# Altium PCB DTM17E0000_REV1.PcbDoc
Units mm, origin at the board's own origin, x right, y up, seen from the top; angles counter-clockwise.
Board outline 50.8 x 22.35 mm, 2 copper layers (Top Layer, Bottom Layer); 47 components, 29 nets, 165 pads, 94 vias.
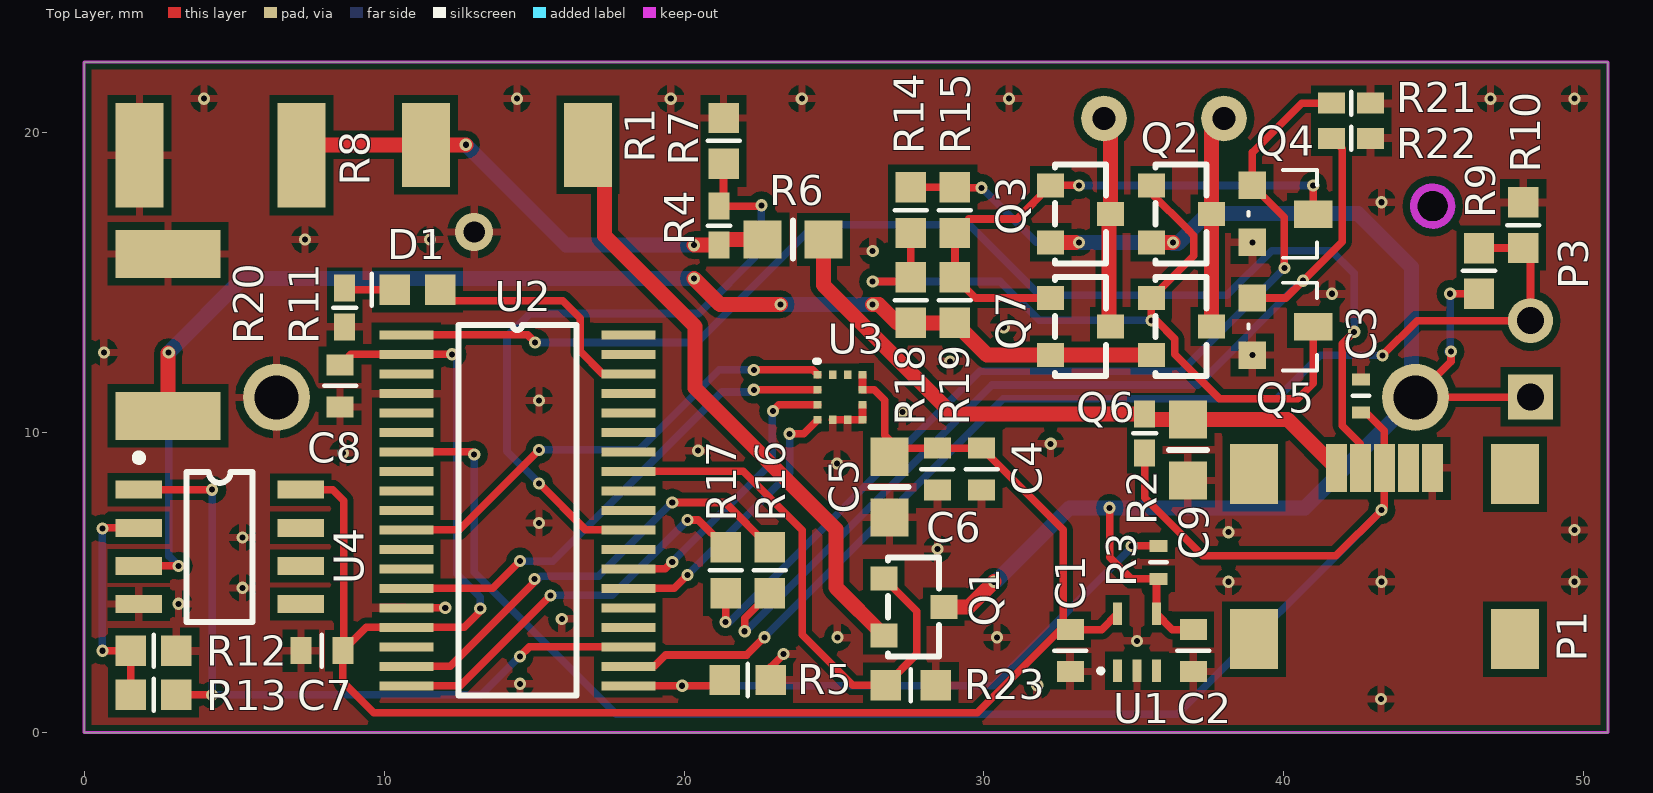
[diagram p0: Top Layer view]
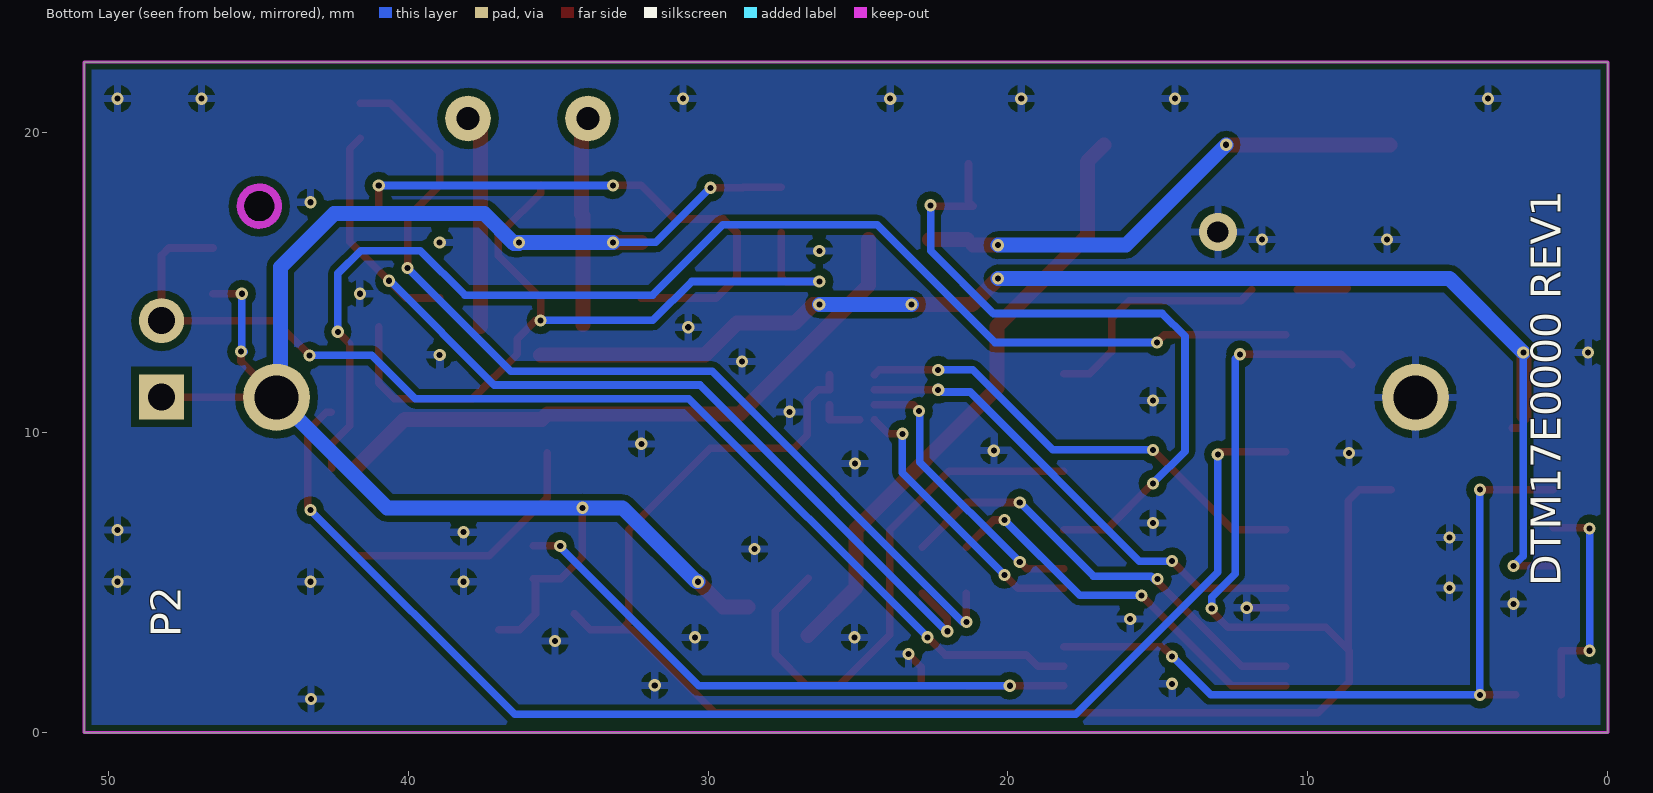
[diagram p1: Bottom Layer view, seen from below]

## Layer stack, top to bottom
Top Solder: solder mask 0.0102, Solder Resist, Dk 3.5
Top Layer: signal copper 0.0356
Dielectric 1: dielectric 0.32, FR-4, Dk 4.8
Bottom Layer: signal copper 0.0356
Bottom Solder: solder mask 0.0102, Solder Resist, Dk 3.5

## Board outline
0,0 50.8,0 50.8,22.352 0,22.352

## Design rules (kind name [scope] priority, off if disabled: settings)
Clearance 0. [All] p1: gap=0.254 except(0.1: SMDPad-SMDPad SMDPad-THPad THPad-THPad; 0.2: Track-Track Track-SMDPad Track-THPad Track-Poly Text-Text)
PolygonConnect [All] p1: connectstyle=Relief reliefconductorwidth=0.254 reliefentries=4 polygonreliefangle="90 Angle" airgapwidth=0.254
RoutingVias [All] p1: holewidth=0.203 width=0.406 viastyle="Through Hole" minholewidth=0.2 minwidth=0.4 maxholewidth=0.25 maxwidth=0.45
SolderMaskExpansion [All] p1: expansion=0.102
Width [All] p1: maxlimit=0.5 minlimit=0.254 preferedwidth=0.254 minimp=50.000000 maximp=50.000000 favimp=50.000000
30 further rules are at their usual default settings.

## Components (designator, comment, footprint, x,y, rotation, side; value= is the part's Value field where it differs from the comment)
C1 "0.1uF" "0603 Small" 32.876,2.732 r90 top
C2 "0.1uF" "0603 Small" 36.978,2.732 r270 top
C3 "1nF" "0402 Small" 42.57,11.227 r270 top
C4 "0.1uF" "0603 Small" 29.92,8.781 r90 top
C5 "10uF" "0805 Small" 26.846,8.18 r90 top
C6 "0.1uF" "0603 Small" 28.447,8.781 r270 top
C7 "0.1uF" "0603 Small" 7.925,2.728 r180 top
C8 "0.1uF" "0603 Small" 8.534,11.558 r270 top
C9 "10uF" "0805 Small" 36.805,9.423 r90 top
D1 "RED" "0603 LED" 11.114,14.757 r180 top
P1 "Mini USB" "Mini USB" 39,3.114 r90 top
P2 "BH123A" "BH123A - duplicate" 6.415,11.176 r0 bottom
P3 "Header 2H" "Header 2" 48.218,11.191 r180 top
Q1 "MOSFET-N" SOT23 27.661,4.191 r270 top
Q2 "MOSFET-P" SOT23 36.581,17.292 r270 top
Q3 "MOSFET-P" SOT23 33.223,17.292 r270 top
Q4 "MMST2222A" SOT-23N 39.961,17.292 r270 top
Q5 "MMST2222A" SOT-23N 39.961,13.536 r270 top
Q6 "MOSFET-N" SOT23 36.581,13.536 r270 top
Q7 "MOSFET-N" SOT23 33.223,13.536 r270 top
R1 "2.7Ω" "2010 resistor" 14.097,19.596 r180 top
R2 "47K" "0402 Resistor" 35.357,9.974 r270 top
R3 "2.7M" "0402 Small" 35.821,5.674 r90 top
R4 "330K" "0402 Resistor" 21.165,16.899 r90 top
R5 "1MΩ" "0603 Resistor" 22.123,1.753 r180 top
R6 "2.4" "0805 Small" 23.629,16.434 r0 top
R7 "1M" "0603 resistor"#1 21.318,19.726 r90 top
R8 "13Ω" "2512 RESISTOR" 4.546,19.246 r0 top
R9 "1MΩ" "0603 Resistor" 46.502,15.392 r270 top
R10 "1MΩ" "0603 Resistor" 47.976,16.916 r270 top (schematic designator R2)
R11 "1KΩ" "0402 Resistor" 8.687,14.165 r90 top
R12 "100KΩ" "0603 Resistor" 2.316,2.728 r180 top
R13 "1MΩ" "0603 Resistor" 2.316,1.255 r180 top
R14 "1M" "0603 resistor"#1 27.559,17.417 r270 top
R15 "1M" "0603 resistor"#1 29.032,17.417 r270 top
R16 "1K" "0603 resistor"#1 22.86,5.41 r90 top
R17 "1K" "0603 resistor"#1 21.387,5.41 r270 top
R18 "10M" "0603 resistor"#1 27.559,14.419 r90 top
R19 "10M" "0603 resistor"#1 29.032,14.419 r90 top
R20 "0.1" "2512 RESISTOR" 2.796,13.259 r270 top
R21 "10K" "0402 Resistor" 42.243,20.98 r0 top
R22 "10K" "0402 Resistor" 42.243,19.812 r0 top
R23 "1K" "0603 resistor"#2 27.558,1.576 r0 top
U1 "TPS71533DCKR" SC70_5 34.451,2.057 r90 top
U2 "MSP430F2272IDA" MSP430F2272IDA 10.744,13.259 r0 top
U3 "LIS2HH12" LIS2HH12 24.451,11.926 r0 top
U4 "TS27L2" SOIC-8 4.521,6.192 r0 top

## Footprints (in the part's own frame and the unit in brackets; to place one, negate y for a bottom-side part, rotate by r counter-clockwise, add the part's x,y. Pads: shape width x height; smd on the part's side, far side on the other; paste and mask are expansions set on the pad)
"0402 Resistor" [mm]
  rect 0.9x0.7 smd: 1(-0.65,0) 2(0.65,0)
  silkscreen extent 0,-0.38 0,0.38, body extent -0.52,-0.27 0.53,0.28, height 0.25
"0402 Small" [mm]
  rect 0.4x0.6 smd: 1(-0.55,0) 2(0.55,0)
  silkscreen extent 0,-0.27 0,0.28, body extent -0.52,-0.27 0.53,0.28, height 0.25
"0603 LED" [mil]
  rect 40x40 smd: 1(-30,0) 2(30,0)
  silkscreen extent 60,-21 60,21, body extent -31,-16 32,16, height 37
"0603 Resistor" [mil] "Axial Device, Thru-Hole; 2 Leads; 0.3 in Pin Spacing"
  rect 40x40 smd: 1(-30,0) 2(30,0)
  silkscreen extent 0,-21 0,21, body extent -30,-15 31,15, height 20
"0603 resistor"#1 [mil]
  rect 40x40 smd: 1(-30,0) 2(30,0)
  silkscreen extent 0,-21 0,21, body extent -30,-15 31,15, height 20
"0603 resistor"#2 [mil]
  rect 40x40 smd: 1(-33,0) 2(33,0)
  silkscreen extent 0,-21 0,21, body extent -30,-15 31,15, height 20
"0603 Small" [mm]
  rect 0.7x0.9 smd: 1(-0.7,0) 2(0.7,0)
  silkscreen extent 0,-0.53 0,0.53, body extent -0.77,-0.38 0.77,0.38, height 0.51
"0805 Small" [mil]
  rect 50x50 smd: 1(-40,0) 2(40,0)
  silkscreen extent 0,-25 0,25, body extent -40,-25 40,25, height 25
"2010 resistor" [mm]
  rect 1.6x2.8 smd: 1(-2.7,0) 2(2.7,0)
"2512 RESISTOR" [mm] "Chip Capacitor, Body 1.6x0.8mm, IPC High Density"
  rect 1.6x3.5 smd: 1(-2.7,0) 2(2.7,0)
"BH123A - duplicate" [mm] "CR123A Battery Holder"
  round 2.232 hole 1.47: 1(37.97,0) 2(0,0)
  Keep-Out Layer board cut-out: 37.93,-6.37 37.978,-6.613 38.116,-6.819 38.322,-6.957 38.565,-7.005 38.565,-7.005 38.808,-6.957 39.014,-6.819 39.152,-6.613 39.2,-6.37 39.2,-6.37 39.152,-6.127 39.014,-5.921 38.808,-5.783 38.565,-5.735 38.565,-5.735 38.322,-5.783 38.116,-5.921 37.978,-6.127 37.93,-6.37
"Header 2" [mm] "Header 2"
  rect 1.5x1.5 hole 0.9: 1(0,0)
  round 1.5 hole 0.9: 2(0,-2.54)
LIS2HH12 [mm]
  rect 0.275x0.25 smd: 1(0,0) 2(0,-0.5) 3(0,-1) 4(0,-1.5) 7(1.5,-1.5) 8(1.5,-1) 9(1.5,-0.5) 10(1.5,0)
  rect 0.25x0.275 smd: 5(0.5,-1.5) 6(1,-1.5) 11(1,0) 12(0.5,0)
  silkscreen extent -0.05,0.46 0.03,0.46
"Mini USB" [mm]
  rect 1.6x0.7 smd: 1(5.7,-2.75) 2(5.7,-3.55) 3(5.7,-4.35) 4(5.7,-5.15) 5(5.7,-5.95)
  rect 2x1.6 smd: 6(5.5,-8.7) 7(0,-8.7) 8(0,0) 9(5.5,0)
MSP430F2272IDA [mm]
  rect 1.8x0.3 smd: 1(0,0) 2(0,-0.65) 3(0,-1.3) 4(0,-1.95) 5(0,-2.6) 6(0,-3.25) 7(0,-3.9) 8(0,-4.55) 9(0,-5.2) 10(0,-5.85) 11(0,-6.5) 12(0,-7.15) 13(0,-7.8) 14(0,-8.45) 15(0,-9.1) 16(0,-9.75) 17(0,-10.4) 18(0,-11.05) 19(0,-11.7) 20(7.4,-11.7) 21(7.4,-11.05) 22(7.4,-10.4) 23(7.4,-9.75) 24(7.4,-9.1) 25(7.4,-8.45) 26(7.4,-7.8) 27(7.4,-7.15) 28(7.4,-6.5) 29(7.4,-5.85) 30(7.4,-5.2) 31(7.4,-4.55) 32(7.4,-3.9) 33(7.4,-3.25) 34(7.4,-2.6) 35(7.4,-1.95) 36(7.4,-1.3) 37(7.4,-0.65) 38(7.4,0)
  silkscreen extent 1.73,-12.03 5.67,0.33
SC70_5 [mm]
  rect 0.75x0.3 smd: 1(0,0) 2(0,-0.65) 3(0,-1.3) 4(1.9,-1.3) 5(1.9,0)
  silkscreen extent -0.08,0.48 0.08,0.63, body extent 0.3,-1.66 1.54,0.34, height 1.07
SOIC-8 [mm]
  rect 1.55x0.6 smd: 1(-2.7,1.905) 2(-2.7,0.635) 3(-2.7,-0.635) 4(-2.7,-1.905) 5(2.7,-1.905) 6(2.7,-0.635) 7(2.7,0.635) 8(2.7,1.905)
  silkscreen extent -2.81,-2.5 1.1,3.09, body extent -1.91,-2.54 1.91,2.54, height 1.52
SOT23 [mm]
  rect 0.8x0.9 smd: 1(-0.95,-1) 2(0.95,-1) 3(0,1)
  silkscreen extent -1.65,-0.86 1.65,0.84, body extent -1.45,-1.32 1.45,1.47, height 1.02
SOT-23N [mil]
  rect 36x36 smd: B(-37.5,-40) E(37.5,-40)
  rect 36x50 smd: C(0.5,40)
  silkscreen extent -57,-45 58,45, body extent -57,-52 57,58, height 40

## Part data
C1 C2 C4 C6 C7 C8: library part CAP, "CAP CER 0.1UF 50V 10% X7R 0603"
C3: library part Cap, "CAP CER 1000PF 6.3V X5R 0402"
C5 C9: library part Cap, "CAP CER 10UF 6.3V X5R 0805"
D1: library part LED2, "Standard LEDs - SMD Red 630nm 700mcd"
P1: "CONN MINI USB RCPT RA TYPE B SMD"
P3: "Header, 2-Pin, Right Angle"
Q1 Q6 Q7: "N-Channel MOSFET"
Q2 Q3: "MOSFET P-CH 20V 4.2A SOT23"
Q4 Q5: library part NPN1, "TRANSISTOR NPN GP 40V SOT23"
R1: library part Resistor, "RES SMD 2.7 OHM 5% 3/4W 2010"
R2: library part Resistor, "RES SMD 47K OHM 5% 1/16W 0402"
R3: library part Resistor, "RES SMD 2.7M OHM 5% 1/16W 0402"
R4: library part Resistor, "RES SMD 330K OHM 5% 1/10W 0603"
R5 R9 R10 R13: library part Res1, "RES SMD 1M OHM 5% 1/10W 0603"
R6: library part Resistor, "RES SMD 2 OHM 5% 0.4W 0805"
R7 R14 R15: library part Resistor, "RES SMD 1M OHM 5% 1/10W 0603"
R8: library part Resistor, "RES SMD 13 OHM 1% 2W 2512"
R11: library part Resistor, "RES 10K OHM .25W 5% 0603 SMD"
R12: library part Res1, "RES SMD 100K OHM 5% 1/10W 0603"
R16 R17 R23: library part Resistor, "RES SMD 1K OHM 5% 1/10W 060"
R18 R19: library part Resistor, "RES SMD 10M OHM 5% 1/10W 0603"
R20: library part Resistor, "RES SMD 0.1 OHM 5% 2W 2512"
R21 R22: library part Resistor, "RES SMD 10K OHM 5% 1/16W 0402"
U1: "IC REG LDO 3.3V 50MA SC70-5"
U2: library part CMP-0365-00081-2, "16 MHz Mixed Signal Microcontroller with 32 KB Flash, 1024 B SARM and 32 GPIOs, -40 to 85 degC, 38-pin SOP (DA), Green (RoHS & no Sb/Br)"
U4: "OP AMP - 2 CHANNEL"

## Free pads (board coordinates)
  round 1.524 hole 0.762: 2(34,20.472) 2(38,20.472)

## Via types
v1: diameter 0.406, hole 0.203, Top Layer to Bottom Layer, tented both sides, 93 vias
v2: diameter 1.27, hole 0.711, Top Layer to Bottom Layer, 1 vias

## Nets (pads, with @x,y where several pads share a name; then routed paths per layer and width w, separated by ;. In a path a pad name is that pad's centre, name@x,y a point inside that pad or via, vN(x,y) a via of type N, cw(c..) or ccw(c..) an arc to the next point about the centre after c; other vN are vias at no path point)
GND: C1.1 C2.2 C3.1 C4.1 C5.1 C6.2 C7.2 C8.2 C9.1 P1.5 P2.2 Q4.E Q5.E R5.1 R7.2 R8.1 R10.1 R11.1 R12.1 R20.1 R21.2 R22.2 R23.2 U1.2 U2.4 U2.15 U3.5 U3.6 U3.7 U3.8 U4.4 | length 3.8
  Top Layer w0.254: U2.15 v1(12.04,4.159) ; R5.1 22.885,2.184 v1(23.317,2.616) ; U3.5 U3.6 U3.7 U3.8 ; Q4.E@38.938,16.332 v1(38.945,16.339)
  other v1: 43.231,1.118 31.775,1.575 14.529,1.626 35.103,3.048 25.121,3.175 30.429,3.175 15.926,3.785 3.15,4.293 5.283,4.826 38.152,5.029 43.256,5.029 49.682,5.029 28.447,6.121 5.283,6.502 38.152,6.68 49.682,6.756 15.17,6.985 25.095,8.966 8.636,9.322 20.472,9.398 32.223,9.627 27.28,10.693 15.17,11.074 28.863,12.37 38.945,12.583 0.66,12.675 30.658,13.513 41.605,14.63 26.289,16.053 7.366,16.434 11.532,16.434 43.256,17.678 4,21.133 14.427,21.133 19.558,21.133 23.927,21.133 30.836,21.133 46.888,21.133 49.682,21.133
  other v2: 13.005,16.688
NetC3_2: C3.2 P1.3 R2.2 U2.7 | length 55.8
  Top Layer w0.254: U2.7 12.916,9.359 v1(13.005,9.271) ; R2.2 35.357,7.823 37.287,5.893 41.732,5.893 v1(43.256,7.417) 43.35,7.511 P1.3 43.35,10.057 42.731,10.677 C3.2
  Bottom Layer w0.254: v1(13.005,9.271) 13.005,5.35 17.745,0.61 36.449,0.61 v1(43.256,7.417)
NetC9_2: C9.2 P1.1 R2.1 R6.2 | length 21.1
  Top Layer w0.5: R6.2 24.645,14.918 28.939,10.624 R2.1 35.542,10.439 C9.2 40.124,10.439 P1.1
NetD1_1: D1.1 U2.36 | length 8.1
  Top Layer w0.254: D1.1 12.232,14.402 15.951,14.402 16.535,13.818 16.535,12.706 17.282,11.959 U2.36
NetD1_2: D1.2 R11.2 | length 1.7
  Top Layer w0.254: R11.2 8.745,14.757 D1.2
NetP1_2: P1.2 U2.1 | length 42.2
  Top Layer w0.254: U2.1 14.782,13.259 v1(15.037,13.005) v1@15.05,12.992 ; v1(42.342,13.36) 41.943,12.962 41.943,10.233 42.55,9.626 P1.2
  Bottom Layer w0.254: v1(15.037,13.005) 20.434,13.005 24.355,16.926 29.505,16.926 31.852,14.58 38.1,14.58 39.588,16.068 41.578,16.068 42.342,15.304 v1(42.342,13.36)
NetP3_2: P3.2 R9.1 R10.2 U2.21 | length 38.8
  Top Layer w0.254: U2.21 19.007,2.209 19.385,2.588 22.095,2.588 v1(22.682,3.175) ; v1(43.282,12.573) 44.44,13.731 P3.2 48.218,15.912 R10.2 R9.1
  Bottom Layer w0.254: v1(22.682,3.175) 30.639,11.132 39.765,11.132 41.206,12.573 v1(43.282,12.573)
NetQ1_1: Q1.1 R23.1 U2.31 | length 18
  Top Layer w0.254: U2.31 21.974,8.709 23.945,6.738 23.945,3.259 25.627,1.576 R23.1 27.762,2.619 27.762,4.04 Q1.1
NetQ1_2: Q1.2 R1.1 | length 20.4
  Top Layer w0.5: R1.1 17.348,19.045 17.348,16.561 20.371,13.538 20.371,11.481 25.07,6.782 25.07,4.833 Q1.2
NetQ2_1: Q2.1 Q5.C Q6.1 R14.2 R18.2 | length 27.2
  Top Layer w0.254: v1(26.289,15.037) 27.415,15.037 R18.2 R14.2 ; Q2.1 35.581,17.979 36.804,16.756 36.995,16.565 36.995,15.9 Q6.1 v1(35.581,13.741) 35.737,13.741 36.358,13.121 36.358,12.619 37.851,11.125 40.462,11.125 40.977,11.64 Q5.C
  Bottom Layer w0.254: v1(26.289,15.037) 30.543,15.037 31.838,13.741 v1(35.581,13.741)
NetQ2_3: pad.2@38,20.472 Q2.3 Q6.3 | length 7.1
  Top Layer w0.5: Q6.3 Q2.3 37.581,20.053 pad.2@38,20.472
NetQ3_1: Q3.1 Q4.C Q7.1 R15.2 R19.2 | length 18.5
  Top Layer w0.254: Q7.1 29.728,14.486 R19.2 R15.2 29.497,17.12 31.101,17.12 Q3.1 v1(33.172,18.242) ; Q4.C@40.97,17.272 Q4.C v1(40.977,18.237)
  Bottom Layer w0.254: v1(33.172,18.242) 33.177,18.237 v1(40.977,18.237)
NetQ3_3: pad.2@34,20.472 Q3.3 Q7.3 | length 7.1
  Top Layer w0.254: Q7.3@34.163,13.596 Q7.3 ; Q3.3@34.163,17.232 Q3.3
  Top Layer w0.5: pad.2@34,20.472 34.223,20.249 Q3.3 ; Q7.3@34.163,13.596 Q3.3@34.163,17.232
NetQ4_B: Q4.B R17.2 R21.1 | length 32.1
  Top Layer w0.254: v1(21.387,3.683) R17.2 ; v1(40.015,15.484) 40.015,17.174 Q4.B 38.945,19.337 40.589,20.98 R21.1
  Bottom Layer w0.254: v1(21.387,3.683) 21.5,3.683 29.857,12.04 36.576,12.04 40.015,15.479 v1(40.015,15.484)
NetQ5_B: Q5.B R16.1 R22.1 | length 32.4
  Top Layer w0.254: v1(22.022,3.378) 22.022,3.805 22.86,4.643 R16.1 ; Q5.B 40.066,14.488 v1(40.64,15.062) 41.939,16.362 41.939,19.465 R22.1
  Bottom Layer w0.254: v1@22.059,3.378 30.267,11.586 37.122,11.586 40.598,15.062 v1(40.64,15.062)
NetQ6_2: Q6.2 Q7.2 R18.1 R19.1 R20.2 U4.3 | length 45.9
  Top Layer w0.254: U4.3 v1(3.15,5.557) ; v1@2.796,12.651 v1(2.819,12.675) ; R20.2@2.819,10.152 R20.2@3.183,10.152
  Top Layer w0.5: R20.2 v1@2.796,12.651 ; v1(20.336,15.138) 21.2,14.275 v1(23.213,14.275) ; v1(26.289,14.275) 26.492,14.275 27.11,13.657 R18.1 R19.1 30.104,12.586 Q7.2 Q6.2
  Bottom Layer w0.254: v1(2.819,12.675) 2.819,5.887 v1(3.15,5.557)
  Bottom Layer w0.5: v1(2.819,12.675) 5.283,15.138 v1(20.336,15.138) ; v1(23.213,14.275) v1(26.289,14.275)
NetR1_2: R1.2 R4.1 R6.1 R8.2 | length 16.8
  Top Layer w0.254: R4.1 R4.1@21.35,16.434
  Top Layer w0.5: R8.2@7.264,19.596 R1.2 v1(12.725,19.596) ; v1(20.336,16.249) R4.1 ; R4.1@21.35,16.434 R6.1
  Bottom Layer w0.5: v1(12.725,19.596) 16.073,16.249 v1(20.336,16.249)
NetR3_2: R3.2 R5.2 U2.20 | length 21.1
  Top Layer w0.254: U2.20 v1(19.939,1.559) R5.2@21.361,1.559 ; v1(34.925,6.224) R3.2
  Bottom Layer w0.254: v1(19.939,1.559) 30.312,1.559 34.925,6.172 v1(34.925,6.224)
NetR4_2: R4.2 R7.1 U2.28 | length 23
  Top Layer w0.254: v1(15.17,8.305) 16.716,6.759 U2.28 ; R7.1 21.318,17.701 R4.2 22.553,17.549 v1(22.581,17.577)
  Bottom Layer w0.254: v1(15.17,8.305) 14.097,9.378 14.097,13.208 14.859,13.97 20.483,13.97 22.581,16.067 v1(22.581,17.577)
NetR12_2: R12.2 R13.2 U4.2 | length 7.7
  Top Layer w0.254: v1(0.61,2.728) R12.2 R13.2 ; v1(0.61,6.807) 0.629,6.827 U4.2
  Bottom Layer w0.254: v1(0.61,2.728) v1(0.61,6.807)
NetR13_1: R13.1 U2.22 U4.1 | length 25
  Top Layer w0.254: U4.1 v1(4.267,8.097) ; R13.1 v1(4.267,1.255) ; v1(14.529,2.54) 14.848,2.859 U2.22
  Bottom Layer w0.254: v1(4.267,8.097) v1(4.267,1.255) 13.243,1.255 v1(14.529,2.54)
NetR16_2: R16.2 U2.18 | length 14.9
  Top Layer w0.254: U2.18 12.201,2.209 15.071,5.08 v1@15.088,5.08 ; v1@19.73,7.671 21.367,7.671 22.86,6.177 R16.2
  Bottom Layer w0.254: v1@15.088,5.08 15.218,5.21 17.148,5.21 v1(19.609,7.671)
  other v1: 15.014,5.118
NetR17_1: R17.1 U2.19 | length 13.3
  Top Layer w0.254: U2.19 12.538,1.559 v1(15.551,4.572) ; v1(20.117,7.087) 20.472,7.087 R17.1
  Bottom Layer w0.254: v1(15.551,4.572) 17.602,4.572 v1(20.117,7.087)
NetU2_11: U2.11 U3.1 | length 16
  Top Layer w0.254: U2.11 12.506,6.759 v1(15.17,9.423) ; v1(22.327,12.09) 24.287,12.09 U3.1
  Bottom Layer w0.254: v1(15.17,9.423) 18.512,9.423 21.179,12.09 v1(22.327,12.09)
NetU2_14: U2.14 U3.2 | length 16.5
  Top Layer w0.254: U2.14 13.623,4.809 v1(14.529,5.715) ; v1(22.327,11.426) U3.2
  Bottom Layer w0.254: v1(14.529,5.715) 15.618,5.715 21.257,11.354 22.174,11.354 v1@22.327,11.506
NetU2_25: U2.25 U3.4 | length 9.4
  Top Layer w0.254: U2.25 19.668,4.809 v1(20.117,5.258) ; v1(23.52,9.96) 23.985,9.96 U3.4
  Bottom Layer w0.254: v1(20.117,5.258) 23.52,8.661 v1(23.52,9.96)
NetU2_26: U2.26 U3.3 | length 9.5
  Top Layer w0.254: U2.26 19.379,5.459 v1(19.609,5.69) ; v1(22.962,10.723) 23.165,10.926 U3.3
  Bottom Layer w0.254: v1(19.609,5.69) 22.936,9.017 v1@22.936,10.697
VBAT: C2.1 P2.1 P3.1 Q1.3 Q2.2 Q3.2 R3.1 R9.2 R14.1 R15.1 U1.4 | length 58.4
  Top Layer w0.254: R14.1 28.829,18.179 28.847,18.161 v1(29.921,18.161) ; v1(34.188,7.493) 34.188,5.842 34.906,5.124 R3.1 35.751,5.055 U1.4 36.276,3.432 C2.1 ; v1(45.542,14.63) R9.2 ; v1(45.568,12.7) 45.568,12.37 44.385,11.187 P2.1 47.7,11.176 P3.1@48.218,11.694
  Top Layer w0.5: Q1.3 29.499,4.191 v1(30.337,5.029) ; Q3.2 v1@33.045,16.342 ; Q2.2 v1(36.297,16.342)
  Bottom Layer w0.254: v1(29.921,18.161) 31.74,16.342 v1@33.045,16.342 ; P2.1@44.247,11.314 P2.1 ; v1@45.466,12.7 45.542,12.776 v1(45.542,14.63)
  Bottom Layer w0.5: v1(30.337,5.029) 30.388,5.029 32.852,7.493 v1(34.188,7.493) 40.702,7.493 P2.1 ; v1(33.172,16.342) v1(36.297,16.342) v1@36.474,16.342 ; v1@36.297,16.307 36.465,16.307 37.455,17.297 42.469,17.297 44.247,15.519 P2.1@44.247,11.314
VCC: C1.2 C4.2 C5.2 C6.1 C7.1 C8.1 U1.5 U2.2 U2.16 U3.9 U3.10 U4.8 | length 66.4
  Top Layer w0.254: U4.8 8.286,8.097 8.661,7.722 C7.1@8.661,2.765 ; C8.1 8.886,12.609 U2.2 v1(12.268,12.609) ; v1(13.208,4.14) 13.208,4.039 12.679,3.509 U2.16 9.406,3.509 C7.1@8.661,2.765 ; U3.10 U3.9 26.344,11.426 26.695,11.074 26.695,9.917 27.131,9.481 C6.1 C4.2 32.639,6.762 32.639,3.669 C1.2 ; U1.5 33.926,3.432 C1.2 ; C7.1@8.661,2.765 C7.1 8.625,1.688 9.652,0.66 29.769,0.66 32.541,3.432 C1.2
  Bottom Layer w0.254: v1(12.268,12.609) 12.421,12.457 12.421,5.292 13.208,4.505 v1(13.208,4.14)
pads on no net: P1.4 P1.6 P1.7 P1.8 P1.9 U1.1 U1.3 U2.3 U2.5 U2.6 U2.8 U2.9 U2.10 U2.12 U2.13 U2.17 U2.23 U2.24 U2.27 U2.29 U2.30 U2.32 U2.33 U2.34 U2.35 U2.37 U2.38 U3.11 U3.12 U4.5 U4.6 U4.7

## Polygon pours and split planes (outlines as drawn)
GND on Bottom Layer "Top Layer-No Net" (solid, pour order 8): 0,22.352 0,0 50.8,0 50.8,22.352
GND on Top Layer "Top Layer-No Net" (solid, pour order 2): 0,22.352 0,0 50.8,0 50.8,22.352 19.558,22.352

## Keep-outs
Keep-Out Layer:
  circle w0.254: c44.958,17.551 r0.63
  lines w0.1: 0,0 50.8,0 50.8,22.352 0,22.352 0,0

## Silkscreen, mask and mechanical layers (free items; w line width, h text height)
Bottom Overlay:
  text "DTM17E0000 REV1" at 1.575,4.877 h1 r270